# EAGLE board panel_backup (EAGLE 9.2.2)
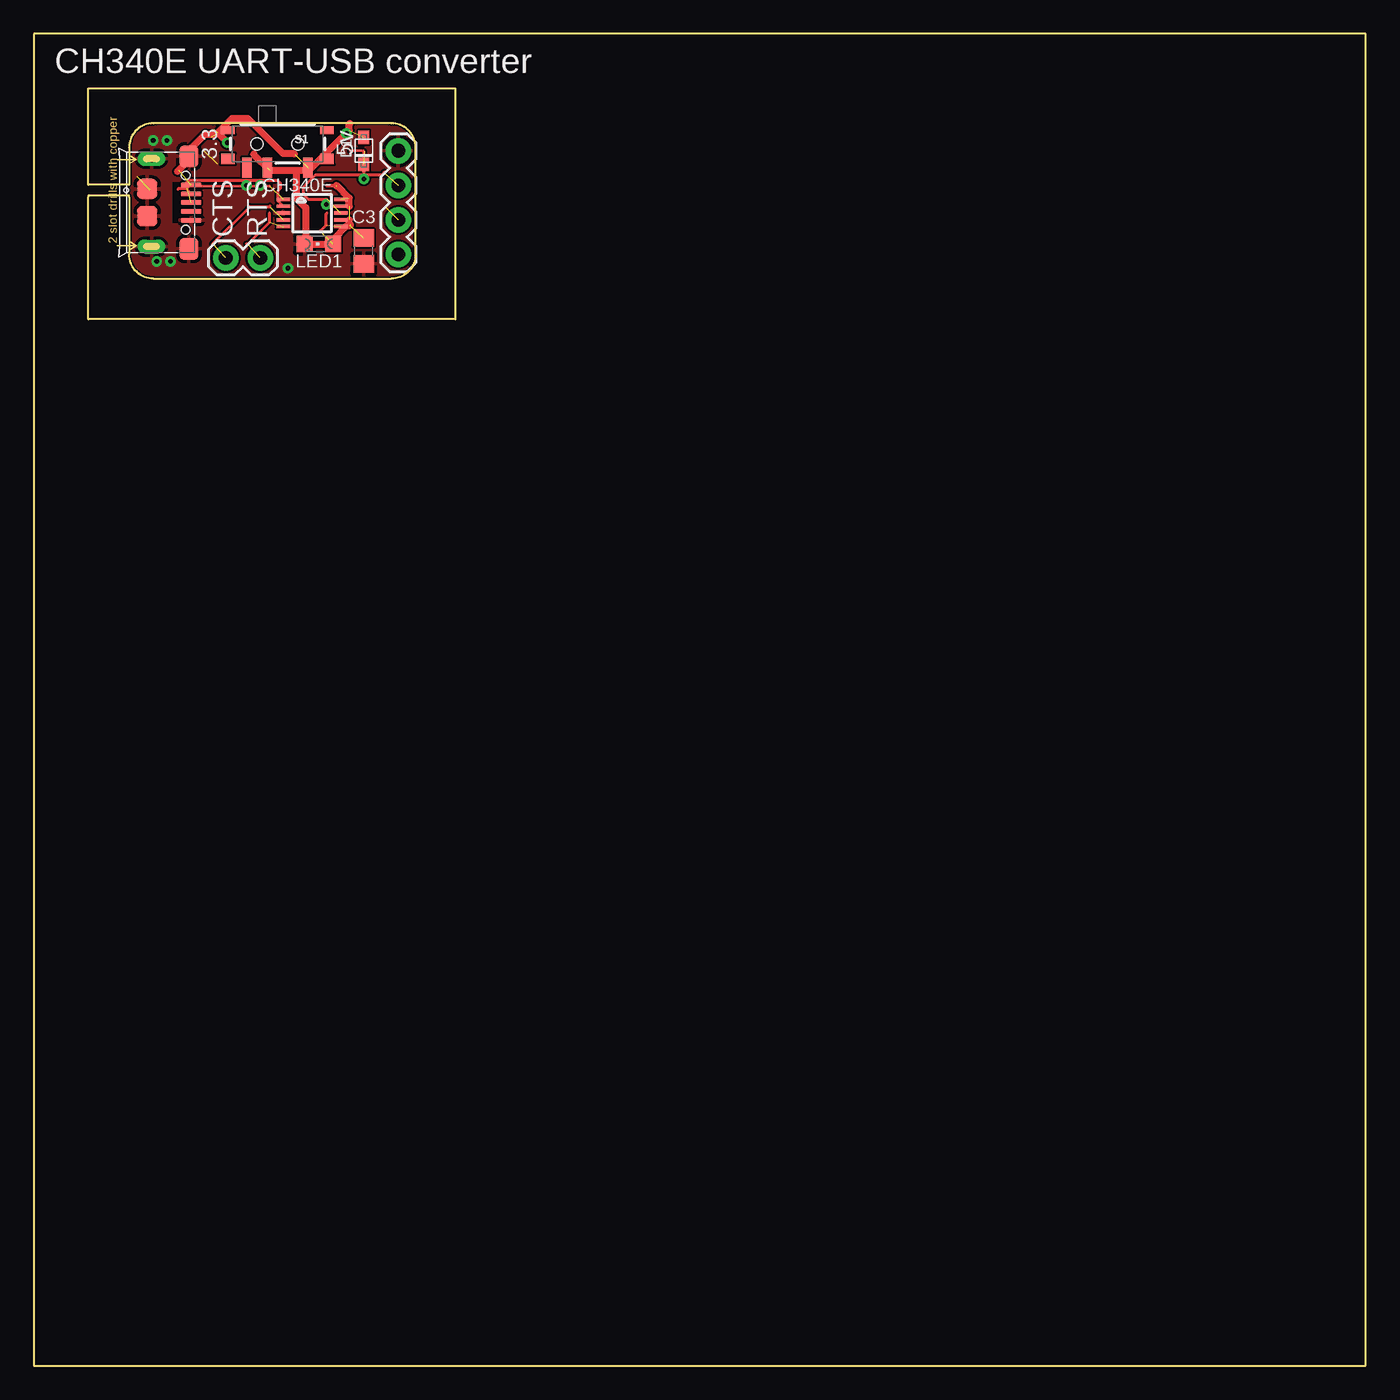
[diagram p0: board, top side]
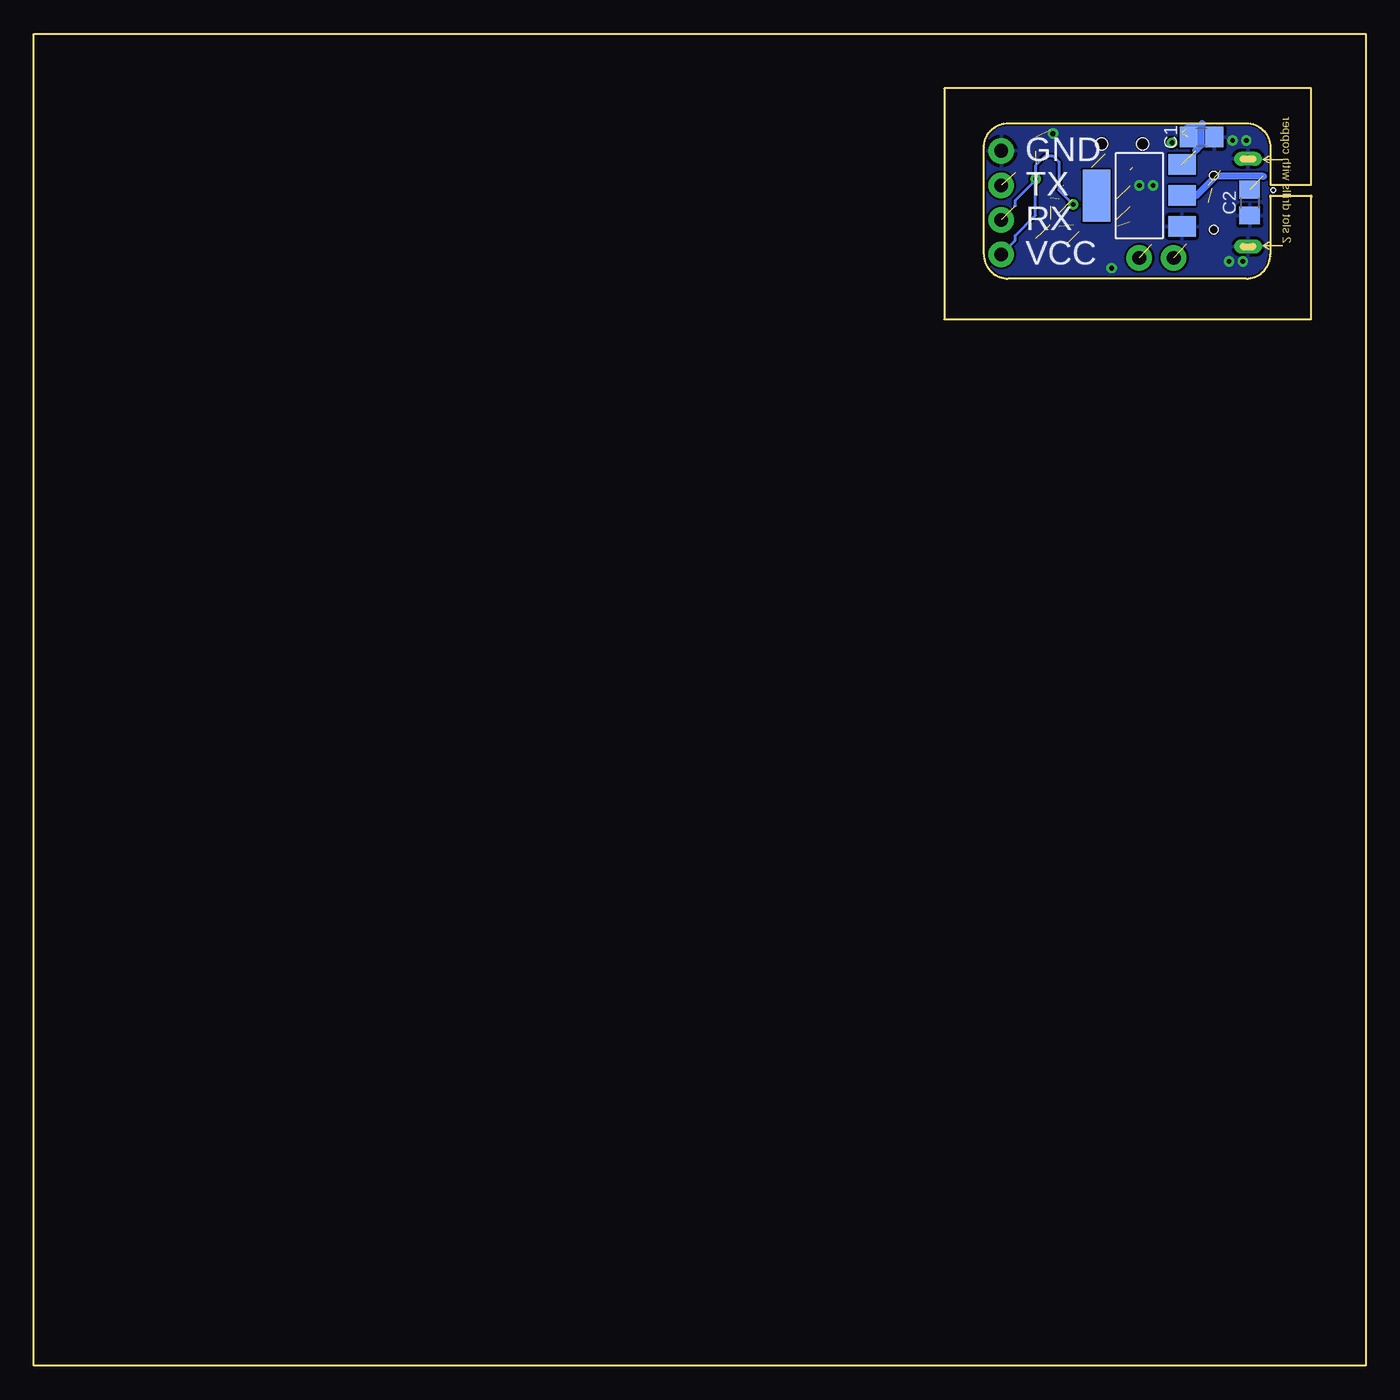
[diagram p1: board, bottom side, seen from below]

Size 98 x 98 mm. Coordinates in mm from the lower left corner, seen from the top.
Outline: 8.78,80 26.3,80 arc90 28.08,81.78 28.08,89.65 arc90 26.3,91.43 8.78,91.43 arc90 7,89.65 7,86.9 4,86.9 4,94 31,94 31,77 4,77 4,86 4,86.1 7,86.1 7,86 7,81.78 arc90 8.78,80
Outline: 0,0 98,0 98,98 0,98 0,0
Copper layers (1*16): Top 0.035mm / dielectric 1.5mm / Bottom 0.035mm
Design rules "default *": minimum track width 6mil, minimum drill 0.35mm, track to track 6mil, track to pad 6mil, pad to pad 6mil, via to via 6mil, smd to smd 6mil, copper to edge 4mil, drill to drill 6mil, minimum pad ring 10mil, minimum via ring 8mil, stop-mask expansion 4mil, vias tented up to drill 0mil, thermal gap 10mil
Net classes: 0 default: width 0.203 mm; 1 power: width 0.508 mm
Holes 0.35 mm at 6.8,86.5

## Footprints (pad centres in the part's own frame; a part is rotated, then mirrored left to right if it is on the bottom)
C0805 = smd 1.3 x 1.5: 1 -0.95,0; 2 0.95,0
MSOP10 = smd 1 x 0.25: 1 -2.113,1; 2 -2.113,0.5; 3 -2.113,0; 4 -2.113,-0.5; 5 -2.113,-1; 6 2.113,-1; 7 2.113,-0.5; 8 2.113,0; 9 2.113,0.5; 10 2.113,1
SOD-323F = smd 1 x 0.8: A -1,0; C 1,0
SOT223 = smd 1.499 x 2.007: 1 -2.261,-3.15; 2 0.025,-3.15; 3 2.311,-3.15 | smd 3.81 x 2.007: 4 0,3.15
1X04 = drill 1.016 pad 1.88: 1 0,0; 2 2.54,0; 3 5.08,0; 4 7.62,0
1X02 = drill 1.016 pad 1.88: 1 0,0; 2 2.54,0
CHIPLED_0805 = smd 1.2 x 1.2: A 0,-1.05; C 0,1.05
SWITCH_SPST_SMD_A = smd 0.7 x 1.5: 1 -2.25,-1.75; 2 -0.75,-1.75; 3 2.25,-1.75 | smd 1 x 0.6: GND1 -3.65,1; GND3 3.65,1 | smd 1 x 0.8: GND2 -3.65,-1.1; GND4 3.65,-1.1 | hole 0.9: -1.5,0; 1.5,0
MICRO-USB5+4P-SMD-0.65-B = smd 0.381 x 1.524: 1 -1.3,-0.25; 2 -0.65,-0.25; 3 0,-0.25; 4 0.65,-0.25; 5 1.3,-0.25 | smd 1.6 x 1.397: S1 -3.4,-0.427; S6 3.4,-0.427 | drill 0.508 pad 1.016 long: S2 -3.226,-3.175; S5 3.226,-3.175 | smd 1.5 x 1.5: S3 -1,-3.5; S4 1,-3.5 | hole 0.635: -2,-0.65; 2,-0.65

## Placement (x,y rotation side)
C1  100nF  [C0805]  12.08,90.41 0 bottom
C2  100nF  [C0805]  8.52,85.59 270 bottom
C3  100nF  [C0805]  24.27,82.03 270 top
CH340E  CH340ESMD  [MSOP10]  20.46,84.83 0 top
D1  [SOD-323F]  24.27,89.4 270 top
IC1  REG1117  [SOT223]  16.65,86.1 90 bottom
J1  [1X04]  26.81,81.78 90 top
J2  [1X02]  16.65,81.52 180 top
LED1  [CHIPLED_0805]  20.97,82.54 90 top
S1  [SWITCH_SPST_SMD_A]  17.92,89.91 0 top
USB2  ST-USB-001G  [MICRO-USB5+4P-SMD-0.65-B]  11.83,85.59 270 top

## Library data of the parts
C1-C3 = rcl-2
CH340E = CH340E
D1 LED1 = adafruit
IC1 = burr-brown-3
J1 = SparkFun-Connectors; PROD_ID: CONN-09696
J2 = SparkFun-Connectors
S1 = SparkFun-Switches; PROD_ID: SWCH-10651; SF_SKU: COM-10860
USB2 = Seeed-Connector; MPN: ST-USB-001G

## Nets
3.3V [power]: S1.1
3V3 [power]: C2.1 IC1.2
5V [power]: C1.1 IC1.3 S1.3 USB2.1
CTS: CH340E.5 J2.1
GND [power]: C1.2 C2.2 C3.2 CH340E.3 IC1.1 J1.4 LED1.C USB2.5 USB2.S1 USB2.S2 USB2.S3 USB2.S4 USB2.S5 USB2.S6
N$1: CH340E.6 LED1.A
RTS: CH340E.4 J2.2
RX: CH340E.9 J1.2
TX: CH340E.8 J1.3
USBN: CH340E.2 USB2.2
USBP: CH340E.1 USB2.3
VCC [power]: C3.1 CH340E.7 CH340E.10 D1.A S1.2
VCC_D: D1.C J1.1

## Tracks (layer width: path | path; a pad name or v marks a point on that pad's centre or on a via)
3V3  (1 unrouted)
  Bottom 0.508: 7.52,87.53 7.55,87.53 11.02,87.53 12.42,86.12 IC1.2
5V  (via drill 0.35)  (6 unrouted)
  Top 0.508: 13.51,90.73 13.42,90.64 12.62,90.64 11.55,89.57 11.55,88.86 10.66,87.97 10.58,87.89 | 13.51,90.73 14.57,91.8 15.73,91.8 18.31,89.22 19.11,89.22 19.17,89.16 | v14.24,90 13.51,90.73
  Bottom 0.508: 12.03,91.41 12.08,91.35 12.08,89.84 12.44,89.48 12.51,89.41 | 13.24,91 13.15,91.09 12.29,91.1 12,91.39
CTS  (2 unrouted)
  Top 0.203: 17.33,84.83 17.33,84.77 17.33,84.15 15.72,82.54 15.65,82.54
GND  (via drill 0.35)
  other vias: 8.78,90.16 9.79,90.16 9.03,81.27 10.05,81.27 15.64,86.86 16.65,86.86 23,90.67 18.68,80.76
  pour Top: 7.1,80 7.1,91.43 28.18,91.43 28.18,80
  pour Bottom: 7.1,80.1 7.1,91.53 28.18,91.53 28.18,80.1
N$1  (2 unrouted)
  Top 0.203: 21.57,84.83 21.51,84.77 21.51,83.94 21.06,83.5
RTS  (2 unrouted)
  Top 0.203: 17.35,85.33 17.33,85.31 15.91,85.31 13.15,82.55 13.12,82.52
RX  (via drill 0.35)  (1 unrouted)
  Top 0.203: v21.53,85.46 21.66,85.33 CH340E.9
  Bottom 0.203: v21.53,85.46 22.57,86.51 22.57,88.59 23.02,89.04 23.55,89.04 24.26,88.33 24.26,87.26 25.77,85.75 25.77,85.38 25.82,85.33
TX  (2 unrouted)
  Top 0.203: 25.82,87.85 25.77,87.8 25.59,87.62 20.71,87.62 19.82,86.73 19.82,86.19 20.19,85.83 21.57,85.83
USBN
  Top 0.203: CH340E.2 17.94,85.74 17.94,86.43 18.1,86.6 18.1,87.06 17.95,87.2 11.35,87.2 10.98,86.84 USB2.2
USBP  (2 unrouted)
  Top 0.203: 17.35,86.83 17.33,86.81 11.46,86.82 11.28,86.64 10.66,86.64 10.59,86.58
VCC  (7 unrouted)
  Top 0.254: CH340E.7 23.2,84.33 | 21.57,86.83 22.24,86.83
  Top 0.508: 23.2,84.33 23.2,84.06 23.27,83.98 | 23.2,85.32 23.2,85.93 22.3,86.83 22.27,86.83 | 19.28,87.97 17.33,87.97 16.17,89.13 16.17,89.16 | 19.28,87.97 20.26,87.97 23.2,90.91 23.2,91.34 23.26,91.41 | 19.28,87.97 19.28,85.93 19.99,85.22 19.99,82.7 20.17,82.52 21.86,82.52 22.04,82.7 22.04,82.91 23.02,83.88 23.27,83.89
VCC_D  (via drill 0.35)  (1 unrouted)
  Top 0.203: v24.29,87.33 24.29,89.36 23.27,89.39
  Bottom 0.203: v24.29,87.33 24.29,84.66 25.77,83.17 25.77,82.82 J1.1

## Text on the board
tPlace: CH340E UART-USB converter | 3.3 | 5v | CTS | RTS
bPlace: GND | TX | RX | VCC
_tNames: S1 | D1 | CH340E | C3 | LED1
_bNames: C1 | C2